# EAGLE board TTGO_shield_revG (EAGLE 9.0.1)

Size 113.14 x 113.14 mm. Coordinates in mm from the lower left corner, seen from the top.
Outline: 44.5,113.14 44.33,113.13 44.16,113.13 43.99,113.11 43.82,113.09 43.65,113.06 43.48,113.03 43.31,112.99 43.15,112.95 42.98,112.9 42.82,112.85 42.66,112.79 42.51,112.72 42.35,112.65 42.2,112.58 42.05,112.5 41.9,112.41 41.75,112.32 41.61,112.22 41.48,112.12 41.34,112.02 41.21,111.91 41.08,111.79 40.96,111.67 1.46,72.18 1.35,72.05 1.23,71.93 1.12,71.8 1.02,71.66 0.91,71.52 0.82,71.38 0.73,71.24 0.64,71.09 0.56,70.94 0.48,70.79 0.41,70.63 0.35,70.47 0.29,70.31 0.23,70.15 0.19,69.99 0.14,69.82 0.1,69.66 0.07,69.49 0.05,69.32 0.03,69.15 0.01,68.98 0,68.81 0,68.64 0,44.5 0,44.33 0.01,44.16 0.03,43.99 0.05,43.82 0.07,43.65 0.1,43.48 0.14,43.31 0.19,43.15 0.23,42.98 0.29,42.82 0.35,42.66 0.41,42.51 0.48,42.35 0.56,42.2 0.64,42.05 0.73,41.9 0.82,41.76 0.91,41.61 1.02,41.48 1.12,41.34 1.23,41.21 1.35,41.08 1.46,40.96 40.96,1.46 41.08,1.35 41.21,1.23 41.34,1.12 41.48,1.02 41.61,0.92 41.75,0.82 41.9,0.73 42.05,0.64 42.2,0.56 42.35,0.48 42.51,0.41 42.66,0.35 42.82,0.29 42.98,0.23 43.15,0.19 43.31,0.14 43.48,0.1 43.65,0.07 43.82,0.05 43.99,0.03 44.16,0.01 44.33,0 44.5,0 68.64,0 68.81,0 68.98,0.01 69.15,0.03 69.32,0.05 69.49,0.07 69.66,0.1 69.82,0.14 69.99,0.19 70.15,0.23 70.31,0.29 70.47,0.35 70.63,0.41 70.79,0.48 70.94,0.56 71.09,0.64 71.24,0.73 71.38,0.82 71.52,0.92 71.66,1.02 71.79,1.12 71.93,1.23 72.05,1.35 72.17,1.46 111.67,40.96 111.79,41.08 111.91,41.21 112.02,41.34 112.12,41.48 112.22,41.61 112.32,41.76 112.41,41.9 112.5,42.05 112.58,42.2 112.65,42.35 112.72,42.51 112.79,42.66 112.85,42.82 112.9,42.98 112.95,43.15 112.99,43.31 113.03,43.48 113.06,43.65 113.09,43.82 113.11,43.99 113.13,44.16 113.13,44.33 113.14,44.5 113.14,68.64 113.13,68.81 113.13,68.98 113.11,69.15 113.09,69.32 113.06,69.49 113.03,69.66 112.99,69.82 112.95,69.99 112.9,70.15 112.85,70.31 112.79,70.47 112.72,70.63 112.65,70.79 112.58,70.94 112.5,71.09 112.41,71.24 112.32,71.38 112.22,71.52 112.12,71.66 112.02,71.8 111.91,71.93 111.79,72.05 111.67,72.18 72.17,111.67 72.05,111.79 71.93,111.91 71.79,112.02 71.66,112.12 71.52,112.22 71.38,112.32 71.24,112.41 71.09,112.5 70.94,112.58 70.79,112.65 70.63,112.72 70.47,112.79 70.31,112.85 70.15,112.9 69.99,112.95 69.82,112.99 69.66,113.03 69.49,113.06 69.32,113.09 69.15,113.11 68.98,113.13 68.81,113.13 68.64,113.14 44.5,113.14
Outline: 59.74,106.57 59.74,106.68 59.74,106.79 59.73,106.9 59.71,107.01 59.7,107.12 59.67,107.23 59.65,107.33 59.62,107.44 59.59,107.54 59.55,107.65 59.51,107.75 59.47,107.85 59.43,107.95 59.38,108.05 59.32,108.15 59.27,108.24 59.21,108.34 59.14,108.43 59.08,108.51 59.01,108.6 58.94,108.68 58.86,108.76 58.78,108.84 58.7,108.92 58.62,108.99 58.54,109.06 58.45,109.13 58.36,109.19 58.27,109.25 58.17,109.31 58.08,109.36 57.98,109.41 57.88,109.46 57.78,109.5 57.67,109.54 57.57,109.58 57.47,109.61 57.36,109.64 57.25,109.67 57.14,109.69 57.03,109.71 56.93,109.72 56.82,109.73 56.71,109.74 56.6,109.74 56.49,109.74 56.38,109.74 56.27,109.73 56.16,109.72 56.05,109.7 55.94,109.68 55.83,109.66 55.72,109.63 55.62,109.6 55.51,109.56 55.41,109.53 55.31,109.48 55.21,109.44 55.11,109.39 55.01,109.34 54.92,109.28 54.82,109.22 54.73,109.16 54.64,109.09 54.56,109.03 54.47,108.95 54.39,108.88 54.31,108.8 54.24,108.72 54.16,108.64 54.09,108.56 54.03,108.47 53.96,108.38 53.9,108.29 53.84,108.2 53.79,108.1 53.74,108 53.69,107.9 53.64,107.8 53.6,107.7 53.56,107.6 53.53,107.49 53.5,107.39 53.47,107.28 53.45,107.17 53.43,107.06 53.42,106.95 53.41,106.84 53.4,106.73 53.39,106.62 53.39,106.51 53.4,106.4 53.41,106.29 53.42,106.18 53.43,106.07 53.45,105.97 53.47,105.86 53.5,105.75 53.53,105.65 53.56,105.54 53.6,105.44 53.64,105.33 53.69,105.23 53.74,105.13 53.79,105.04 53.84,104.94 53.9,104.85 53.96,104.76 54.03,104.67 54.09,104.58 54.16,104.5 54.24,104.41 54.31,104.33 54.39,104.26 54.47,104.18 54.56,104.11 54.64,104.04 54.73,103.98 54.82,103.92 54.92,103.86 55.01,103.8 55.11,103.75 55.21,103.7 55.31,103.65 55.41,103.61 55.51,103.57 55.62,103.54 55.72,103.51 55.83,103.48 55.94,103.46 56.05,103.44 56.16,103.42 56.27,103.41 56.38,103.4 56.49,103.39 56.6,103.39 56.71,103.4 56.82,103.4 56.93,103.41 57.03,103.43 57.14,103.45 57.25,103.47 57.36,103.49 57.47,103.52 57.57,103.56 57.67,103.59 57.78,103.63 57.88,103.68 57.98,103.72 58.08,103.77 58.17,103.83 58.27,103.89 58.36,103.95 58.45,104.01 58.54,104.08 58.62,104.15 58.7,104.22 58.78,104.29 58.86,104.37 58.94,104.45 59.01,104.54 59.08,104.62 59.14,104.71 59.21,104.8 59.27,104.89 59.32,104.99 59.38,105.09 59.43,105.18 59.47,105.28 59.51,105.39 59.55,105.49 59.59,105.59 59.62,105.7 59.65,105.8 59.67,105.91 59.7,106.02 59.71,106.13 59.73,106.24 59.74,106.35 59.74,106.46 59.74,106.57
Copper layers (1*16): Top 0.035mm / dielectric 1.5mm / Bottom 0.035mm
Design rules "default *": minimum track width 6mil, minimum drill 0.35mm, track to track 6mil, track to pad 6mil, pad to pad 6mil, via to via 6mil, smd to smd 6mil, copper to edge 40mil, drill to drill 6mil, minimum pad ring 12mil, minimum via ring 8mil, stop-mask expansion 4mil, vias tented up to drill 0mil, thermal gap 10mil
Net classes: 0 Default: width 0.381 mm, clearance 0.254 mm; 1 Rail: width 0.635 mm, clearance 0.254 mm

## Footprints (pad centres in the part's own frame; a part is rotated, then mirrored left to right if it is on the bottom)
0603 = smd 1.1 x 1: 1 -0.85,0; 2 0.85,0
0805 = smd 0.8 x 1.2: 1 -0.9,0; 2 0.9,0
CAPSENSE_BUTTON = drill 0.6: 1 0,0
1X04_LONGPADS = drill 1.118 pad 1.88 long: 1 0,0; 2 2.54,0; 3 5.08,0; 4 7.62,0
WS2812B = smd 1.651 x 1: 1 2.577,-1.6; 2 2.577,1.6; 3 -2.577,1.6; 4 -2.577,-1.6
CT1205HSMTTR = smd 4 x 3: 1 -5.4,0; 2 5.4,0
CHIPLED-4 = smd 0.7 x 0.75: 1 -0.6,0.7; 2 -0.6,-0.7; 3 0.6,-0.7; 4 0.6,0.7
TTGO-ESP32-OLED-18650 = drill 1 offset: 0 26.67,16.51; 2 26.67,13.97; 3.3V 0,49.53; 4 26.67,19.05; 5 26.67,26.67; 5V 0,3.81; 12 0,19.05; 13 0,13.97; 14 0,21.59; 15 26.67,11.43; 16 26.67,21.59; 17 26.67,24.13; 18 26.67,29.21; 19 26.67,31.75; 21 26.67,36.83; 22 26.67,44.45; 23 26.67,46.99; 25 0,29.21; 26 0,26.67; 27 0,24.13; 32 0,34.29; 33 0,31.75; 34 0,39.37; 35 0,36.83; CLK 26.67,3.81; CMD 0,6.35; EN 0,46.99; GND 0,16.51; GND_2 26.67,34.29; GND_3 26.67,49.53; NC 0,1.27; NC_2 26.67,1.27; RX 26.67,39.37; SD0 26.67,6.35; SD1 26.67,8.89; SD2 0,11.43; SD3 0,8.89; SVN 0,41.91; SVP 0,44.45; TX 26.67,41.91
JS1400BFQ = smd 2 x 1: 1 -4,1.43; 2 -4,0; 3 -4,-1.43; 4 4,1.43; 5 4,0; 6 4,-1.43 | smd 2 x 1.8: P$1 0,4.05; P$2 0,-4.05 | hole 0.991: 0,-1.905 | hole 0.711: 0,2.032
HEMA-TTGO = smd 1.6 x 4: A 2.984,5.607; B 5.984,5.607; C 8.984,5.607; D 11.984,5.607 | smd 2 x 2.6: P$1 -1.025,1.305; P$2 15.993,1.305

## Placement (x,y rotation side)
C1  0.1uF  [0603]  12.67,44.95 315 top
C2  0.1uF  [0603]  19.03,38.59 315 top
C3  0.1uF  [0603]  25.4,32.23 315 top
C4  0.1uF  [0603]  31.76,25.86 315 top
C5  0.1uF  [0603]  38.12,19.5 315 top
C6  0.1uF  [0603]  75.38,19.46 45 top
C7  0.1uF  [0603]  81.74,25.83 45 top
C8  0.1uF  [0603]  88.1,32.19 45 top
C9  0.1uF  [0603]  94.47,38.55 45 top
C10  0.1uF  [0603]  100.83,44.92 45 top
C11  1.0uF  [0805]  5.57,70.57 0 top
CAP1  CAPSENSE_BUTTON  [CAPSENSE_BUTTON]  30.71,86.46 0 top
CAP2  CAPSENSE_BUTTON  [CAPSENSE_BUTTON]  30.71,72.46 0 top
J1  [1X04_LONGPADS]  80.26,52.32 0 top
J2  [1X04_LONGPADS]  87.88,42.57 180 top
J3  [1X04_LONGPADS]  87.88,62.07 180 top
J4  [1X04_LONGPADS]  87.88,71.82 180 top
J5  [1X04_LONGPADS]  87.88,81.57 180 top
LED1  WS2812B  [WS2812B]  9.13,41.42 315 top
LED2  WS2812B  [WS2812B]  15.5,35.05 315 top
LED3  WS2812B  [WS2812B]  21.86,28.69 315 top
LED4  WS2812B  [WS2812B]  28.23,22.33 315 top
LED5  WS2812B  [WS2812B]  34.59,15.96 315 top
LED6  WS2812B  [WS2812B]  78.91,15.93 45 top
LED7  WS2812B  [WS2812B]  85.28,22.29 45 top
LED8  WS2812B  [WS2812B]  91.64,28.65 45 top
LED9  WS2812B  [WS2812B]  98,35.02 45 top
LED10  WS2812B  [WS2812B]  104.37,41.38 45 top
LS1  CT-1205H-SMT-TR  [CT1205HSMTTR]  11.57,59.57 0 top
LTSNS1  LTR-329ALS-01  [CHIPLED-4]  9.57,70.57 0 top
MAIN  TTGO-ESP32-OLED-18650  [TTGO-ESP32-OLED-18650]  69.94,82.44 180 top
R1  4.7k  [0603]  13.57,70.57 0 top
R2  4.7k  [0603]  19.57,70.57 0 top
R3  470  [0603]  3.74,45.15 315 top
R4  10k  [0603]  5.86,47.28 315 top
R5  10k  [0603]  96.07,68.32 0 top
R6  10k  [0603]  101.57,68.32 0 top
R7  10k  [0603]  107.07,68.32 0 top
R8  10k  [0603]  107.07,65.07 0 top
R9  10k  [0603]  96.07,65.07 0 top
R10  220  [0603]  17.57,49.57 0 top
S1  JS1400BFQ  [JS1400BFQ]  101.1,56.73 315 top
U$1  HEMA-TTGO  [HEMA-TTGO]  49.06,0.01 0 top

## Library data of the parts
C1-C10 = SparkFun-Capacitors; PROD_ID: CAP-08604
C11 = SparkFun-Capacitors; PROD_ID: CAP-08064
CAP1 CAP2 MAIN S1 U$1 = BadgeParts
J1-J5 = SparkFun-Connectors; PROD_ID: CONN-09696
LED1-LED10 = SparkFun-LED; PROD_ID: DIO-12503
LS1 = BadgeParts; ARROW_PART_NUMBER: CT-1205H-SMT-TR; ARROW_PRICE/STOCK: https://www.arrow.com/en/products/ct-1205h-smt-tr/cui-inc; DESCRIPTION: Speakers & Transducers Buzzers; HEIGHT: 10mm; MANUFACTURER_NAME: CUI; MANUFACTURER_PART_NUMBER: CT-1205H-SMT-TR
LTSNS1 = NickParts
R1 R2 = SparkFun-Resistors; PROD_ID: RES-07857
R3 R10 = SparkFun-Resistors; PROD_ID: RES-07869
R4-R9 = SparkFun-Resistors; PROD_ID: RES-00824

## Nets
5V: MAIN.5V
15: MAIN.15 R10.1
25: J3.1 J3.2 J3.3 J3.4 MAIN.25
26: J4.1 J4.2 J4.3 J4.4 MAIN.26
27: J5.1 J5.2 J5.3 J5.4 MAIN.27
32: CAP1.1 MAIN.32
33: CAP2.1 MAIN.33
34: J1.1 J1.2 J1.3 J1.4 MAIN.34
35: J2.1 J2.2 J2.3 J2.4 MAIN.35
GND [Rail]: C1.2 C2.2 C3.2 C4.2 C5.2 C6.2 C7.2 C8.2 C9.2 C10.2 C11.2 LED1.3 LED2.3 LED3.3 LED4.3 LED5.3 LED6.3 LED7.3 LED8.3 LED9.3 LED10.3 LS1.2 LTSNS1.2 MAIN.GND MAIN.GND_2 MAIN.GND_3 S1.5 U$1.D
J-DOWN: MAIN.18 R8.1 S1.4
J-LEFT: MAIN.19 R9.1 S1.6
J-PRESS: MAIN.16 R6.2 S1.2
J-RIGHT: MAIN.23 R5.2 S1.1
J-UP: MAIN.14 R7.2 S1.3
N$1: LED5.2 LED6.4
N$2: LED6.2 LED7.4
N$3: LED7.2 LED8.4
N$4: LED8.2 LED9.4
N$5: LED4.2 LED5.4
N$6: LED9.2 LED10.4
N$7: LS1.1 R10.2
N$9: LED1.2 LED2.4
N$10: LED2.2 LED3.4
N$11: LED3.2 LED4.4
N$12: LED1.4 R3.1
RGBLEDS: MAIN.17 R3.2 R4.1
SCL: LTSNS1.4 MAIN.22 R2.1 U$1.C
SDA: LTSNS1.3 MAIN.21 R1.1 U$1.B
VDD [Rail]: C1.1 C2.1 C3.1 C4.1 C5.1 C6.1 C7.1 C8.1 C9.1 C10.1 C11.1 LED1.1 LED2.1 LED3.1 LED4.1 LED5.1 LED6.1 LED7.1 LED8.1 LED9.1 LED10.1 LTSNS1.1 MAIN.3.3V R1.2 R2.2 R4.2 R5.1 R6.1 R7.1 R8.2 R9.2 U$1.A

## Tracks (layer width: path | path; a pad name or v marks a point on that pad's centre or on a via)
15  (1 unrouted)
25  (4 unrouted)
26  (4 unrouted)
27  (4 unrouted)
32  (1 unrouted)
33  (1 unrouted)
34  (4 unrouted)
35  (4 unrouted)
GND  (27 unrouted)
J-DOWN  (2 unrouted)
J-LEFT  (2 unrouted)
J-PRESS  (2 unrouted)
J-RIGHT  (2 unrouted)
J-UP  (2 unrouted)
N$1  (1 unrouted)
N$2  (1 unrouted)
N$3  (1 unrouted)
N$4  (1 unrouted)
N$5  (1 unrouted)
N$6  (1 unrouted)
N$7  (1 unrouted)
N$9  (1 unrouted)
N$10  (1 unrouted)
N$11  (1 unrouted)
N$12  (1 unrouted)
RGBLEDS  (2 unrouted)
SCL  (3 unrouted)
SDA  (3 unrouted)
VDD  (31 unrouted)

## Text on the board
bPlace: /Users/taylor/Documents/Github/CAAint/Media/Poop_Emoji_7b204f05-eec6-4496-91b1-351acc03d2c7_large.bmp